# Altium PCB main.PcbDoc
Units mm, origin at the board's own origin, x right, y up, seen from the top; angles counter-clockwise.
Board outline 56.13 x 37.08 mm, 2 copper layers (Top Layer, Bottom Layer); 33 components, 25 nets, 144 pads, 358 vias.
Unrouted connection lines stored in the file: 2.
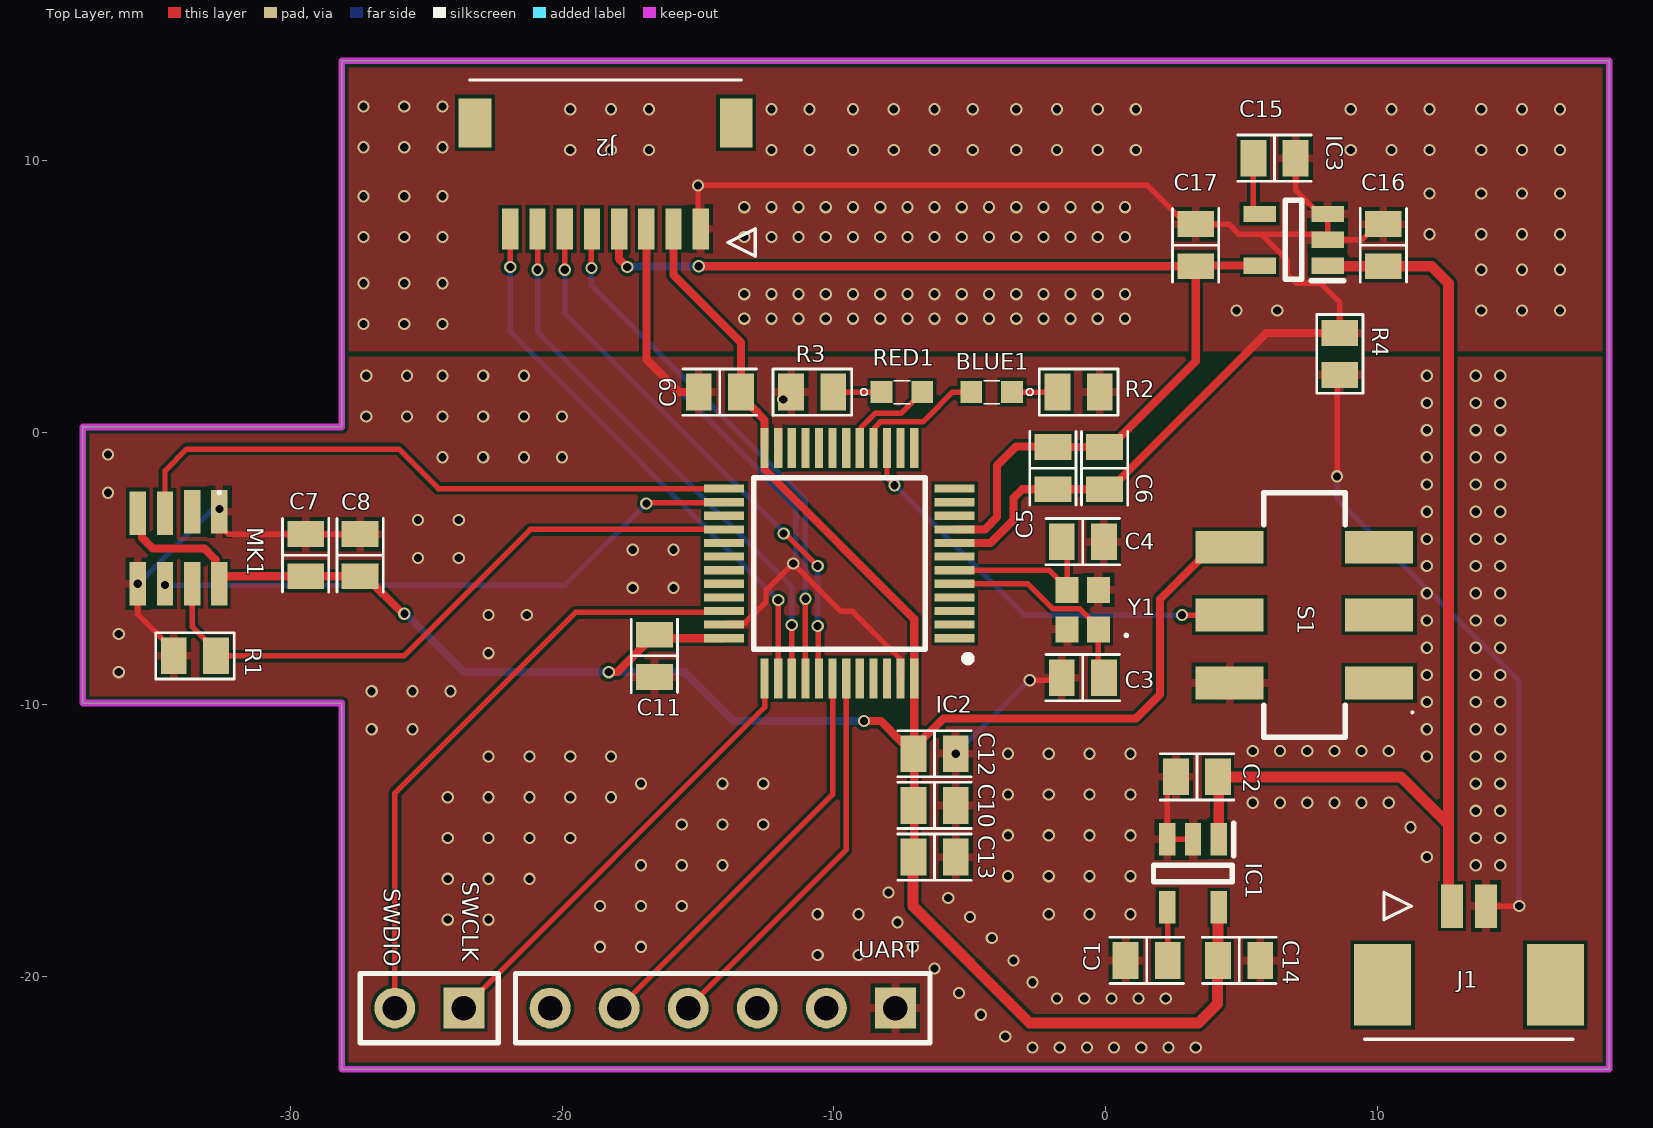
[diagram p0: Top Layer view]
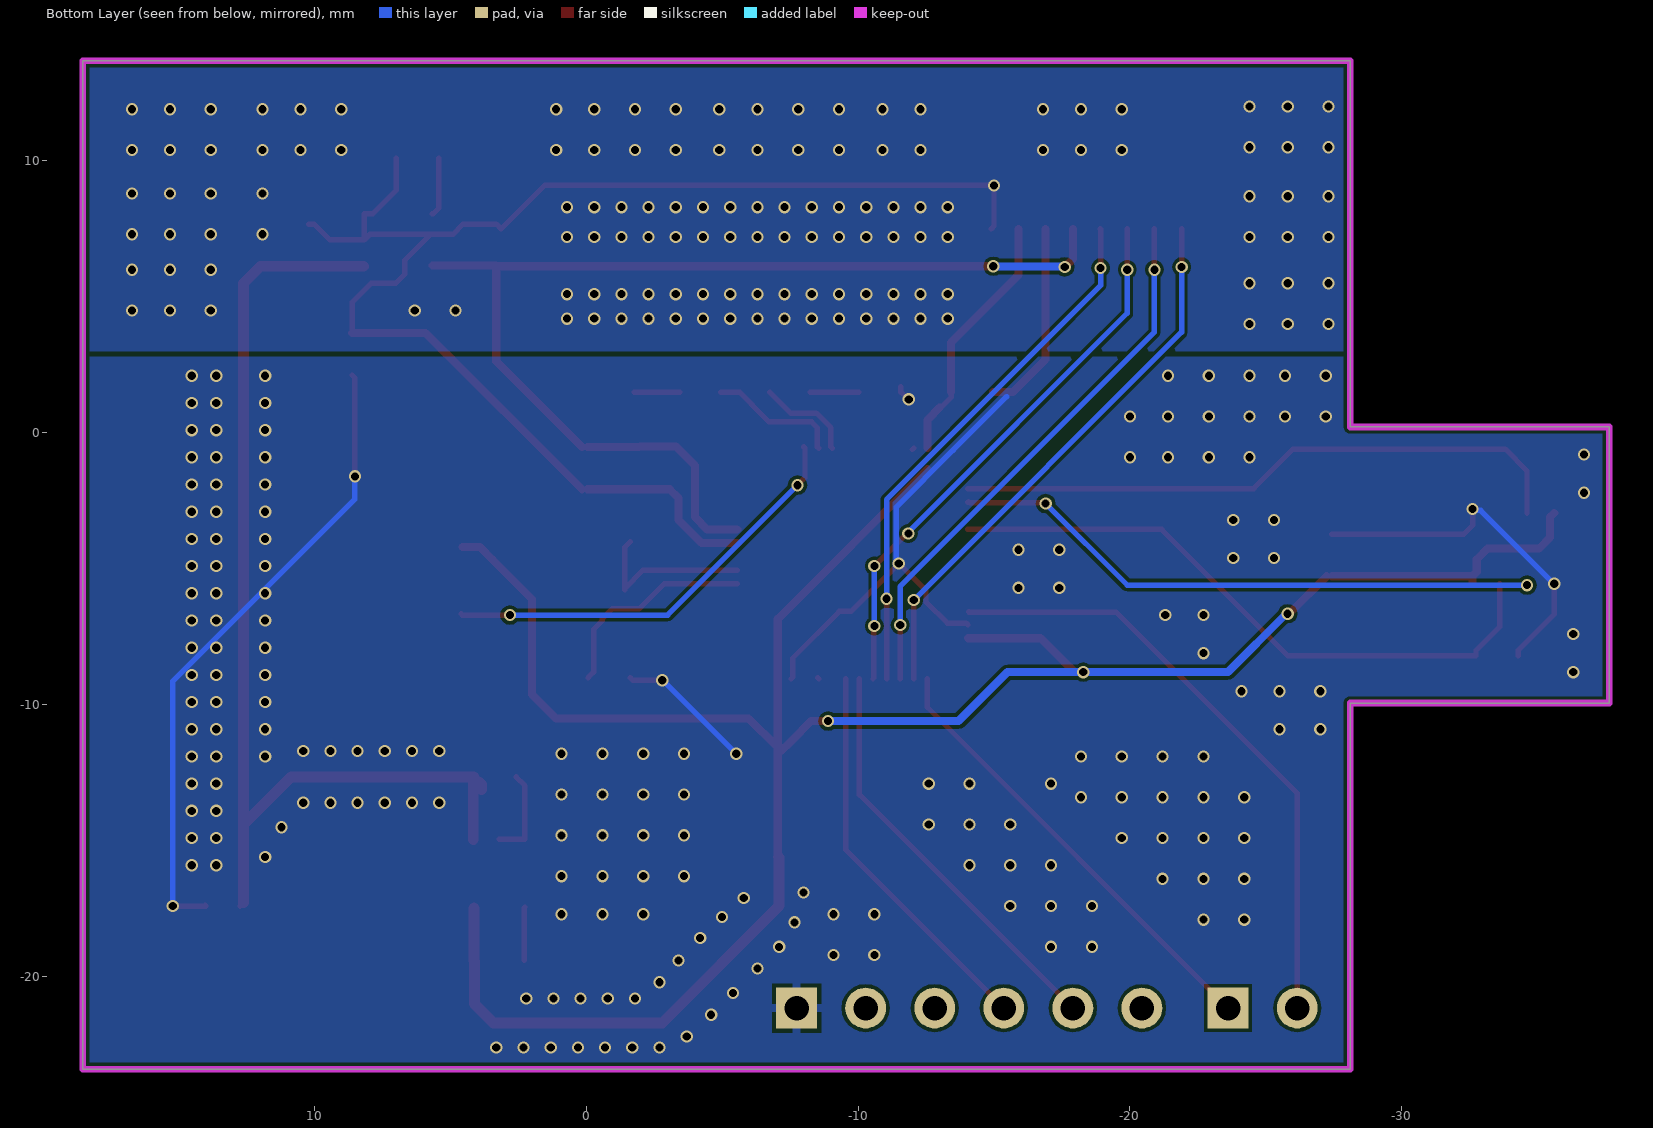
[diagram p1: Bottom Layer view, seen from below]

## Layer stack, top to bottom
Top Solder: solder mask 0.0102, Solder Resist, Dk 3.5
Top Layer: signal copper 0.0356
Dielectric 1: dielectric 0.32, FR-4, Dk 4.8
Bottom Layer: signal copper 0.0356
Bottom Solder: solder mask 0.0102, Solder Resist, Dk 3.5

## Board outline
-37.625,-9.938 -37.625,0.222 -28.1,0.222 -28.1,13.684 18.509,13.684 18.509,-23.4 -28.1,-23.4 -28.1,-9.938

## Design rules (kind name [scope] priority, off if disabled: settings)
Clearance "Poor Polygon clearance" [All] p1 off: gap=0.2 ignorepadtopadclearanceinfootprint=FALSE except(0: Text-Hole; 0.13: Text-Text) // hsdgt
Clearance "minimum clearance" [All] p2: gap=0.125 ignorepadtopadclearanceinfootprint=FALSE except(0.13: Text-Text) // hsdgt
HoleSize [All] p1: absolutevalues=TRUE maxlimit=5 minlimit=0.2 maxpercent=80.000 minpercent=20.000
PlaneClearance [All] p1: clearance=0.125
PlaneConnect [All] p1: planeconnectstyle=Relief reliefexpansion=0.2 reliefentries=4 reliefconductorwidth=0.3 reliefairgap=0.15
PolygonConnect [All] p1: thpad.connectstyle=Relief thpad.reliefconductorwidth=0.3 thpad.reliefentries=4 thpad.polygonreliefangle="90 Angle" thpad.airgapwidth=0.15 smdpad.connectstyle=Relief smdpad.reliefconductorwidth=0.3 smdpad.reliefentries=4 smdpad.polygonreliefangle="90 Angle" smdpad.airgapwidth=0.15 via.connectstyle=Direct via.reliefconductorwidth=0.3 via.reliefentries=4 via.polygonreliefangle="90 Angle" via.airgapwidth=0.15
RoutingVias "0.3 - 0.45 Via" [All] p1: holewidth=0.3 width=0.45 viastyle="Through Hole" minholewidth=0.2 minwidth=0.2 maxholewidth=5 maxwidth=5
RoutingVias "0.4 - 0.55 Via" [All] p2: holewidth=0.4 width=0.55 viastyle="Through Hole" minholewidth=0.2 minwidth=0.2 maxholewidth=5 maxwidth=5
SilkToSilkClearance [All] p1: silktosilkclearance=0.13
SolderMaskExpansion [All] p1: expansion=0.05 istentingtop=FALSE
Width "0.4 Line" [All] p1 off: maxlimit=5 minlimit=0.125 preferedwidth=0.4 minimp=50.000000 maximp=50.000000 favimp=50.000000
Width "0.2 Line" [All] p2: maxlimit=5 minlimit=0.125 preferedwidth=0.2 minimp=50.000000 maximp=50.000000 favimp=50.000000
Width "0.254 Line" [All] p3 off: maxlimit=5 minlimit=0.125 preferedwidth=0.254 minimp=50.000000 maximp=50.000000 favimp=50.000000
26 further rules are at their usual default settings.

## Components (designator, comment, footprint, x,y, rotation, side; value= is the part's Value field where it differs from the comment)
BLUE1 "LG_L29K" "OSRAM LG L29K" -4.2,1.5 r180 top
C1 "10nF" CAP_2012 1.5,-19.4 r0 top value=100pF
C2 "100nF" CAP_2012 3.35,-12.65 r0 top value=100pF
C3 "12pF" CAP_2012 -0.85,-9 r180 top value=100pF
C4 "12pF" CAP_2012 -0.85,-4 r0 top value=100pF
C5 "10nF" CAP_2012 -1.95,-1.3 r90 top value=100pF
C6 "1uF" CAP_2012 -0.05,-1.3 r90 top value=100pF
C7 "100nF" CAP_2012 -29.425,-4.5 r270 top value=100pF
C8 "10uF" CAP_2012 -27.425,-4.5 r270 top value=100pF
C9 "100nF" CAP_2012 -14.2,1.5 r0 top value=100pF
C10 "100nF" CAP_2012 -6.3,-13.7 r180 top value=100pF
C11 "100nF" CAP_2012 -16.6,-8.2 r90 top value=100pF
C12 "100nF" CAP_2012 -6.3,-11.8 r180 top value=100pF
C13 "4.7uF" CAP_2012 -6.3,-15.6 r180 top value=100pF
C14 "1uF" CAP_2012 4.9,-19.4 r180 top value=100pF
C15 "10nF" CAP_2012 6.2,10.1 r180 top value=100pF
C16 "100nF" CAP_2012 10.2,6.9 r270 top value=100pF
C17 "1uF" CAP_2012 3.3,6.9 r270 top value=100pF
IC1 "TPS79133DBVREP" SOT95P280X145-5N 3.2,-16.2 r270 top
IC2 "STM32F301C8T6TR" QFP50P900X900X160-48N -9.8,-4.8 r180 top
IC3 "TPS79133DBVREP" SOT95P280X145-5N 6.9,7.1 r180 top
J1 "532610271" 532610271 13.35,-17.4 r0 top
J2 "2035590807" 2035590807 -18.4,7.5 r180 top
MK1 "CMM-4030D-261-I2S-TR" CMM4030D261I2STR -34.1,-4.25 r90 top
R1 "100k" RES_2012 -33.5,-8.2 r0 top value=100ohm
R2 "1k" RES_2012 -1,1.5 r180 top value=100ohm
R3 "1k" RES_2012 -10.8,1.5 r0 top value=100ohm
R4 "0" RES_2012 8.6,2.9 r90 top value=100ohm
RED1 "LG_L29K" "OSRAM LG L29K" -7.5,1.5 r0 top
S1 "JS202011SCQN" JS202011SCQN 7.3,-6.7 r90 top
SWCLK "SWD" HDR1X2 -23.61,-21.15 r180 top (schematic designator 1)
UART "UART" HDR1X6 -7.74,-21.15 r180 top (schematic designator UART1)
Y1 "FA-128_32MHz" FA128480000MF20XK -0.85,-6.5 r90 top

## Footprints (in the part's own frame and the unit in brackets; to place one, negate y for a bottom-side part, rotate by r counter-clockwise, add the part's x,y. Pads: shape width x height; smd on the part's side, far side on the other; paste and mask are expansions set on the pad)
532610271 [mm]
  rect 0.8x1.6 smd: 1(-0.625,0) 2(0.625,0)
  rect 2.1x3 smd: 3(-3.175,-2.9) 4(3.175,-2.9)
  silkscreen extent -3.83,-4.9 3.83,0.5, body extent -3.83,-4.68 3.83,0.52, height 3.4
2035590807 [mm]
  rect 0.6x1.5 smd: 1(-3.5,0) 2(-2.5,0) 3(-1.5,0) 4(-0.5,0) 5(0.5,0) 6(1.5,0) 7(2.5,0) 8(3.5,0)
  rect 1.2x1.8 smd: 9(-4.8,-3.9) 10(4.8,-3.9)
  silkscreen extent -5.5,-5.48 5,1, body extent -5.05,-5.46 4.95,0.44, height 3
CAP_2012 [mm]
  rect 0.95x1.35 smd: 1(-0.775,0) 2(0.775,0)
  silkscreen extent -1.35,-0.85 1.35,0.85, body extent -1.1,-0.72 1.1,0.72, height 0.7
CMM4030D261I2STR [mm]
  rect 1.6x0.6 smd: 1(1.35,-1.5) 2(1.35,-0.5) 3(1.3,0.5) 4(1.3,1.5) 5(-1.3,1.5) 6(-1.3,0.5) 7(-1.3,-0.5) 8(-1.3,-1.5)
  silkscreen extent 2,-1.55 2.1,-1.45, body extent -1.5,-2 1.5,2, height 1.45
FA128480000MF20XK [mm]
  rect 0.95x0.85 smd: 1(-0.725,-0.575) 2(0.725,-0.575) 3(0.725,0.575) 4(-0.725,0.575)
  silkscreen extent -1,-1.65 -0.9,-1.55, body extent -1.11,-0.91 1.11,0.91, height 0.6
HDR1X2 [mm] "Connector; Header; 2 Position"
  rect 1.5x1.5 hole 0.9: 1(0,0)
  round 1.5 hole 0.9: 2(2.54,0)
  silkscreen extent -1.27,-1.27 3.81,1.27
HDR1X6 [mm] "Connector; Header; 6 Position"
  rect 1.5x1.5 hole 0.9: 1(0,0)
  round 1.5 hole 0.9: 2(2.54,0) 3(5.08,0) 4(7.62,0) 5(10.16,0) 6(12.7,0)
  silkscreen extent -1.27,-1.27 13.97,1.27
JS202011SCQN [mm]
  rect 1.2x2.5 smd: 1(-2.5,-2.75) 2(0,-2.75) 3(2.5,-2.75) 4(2.5,2.75) 5(0,2.75) 6(-2.5,2.75)
  silkscreen extent -4.5,-4 4.5,1.5, body extent -4.5,-3.5 4.5,3.5, height 5.65
"OSRAM LG L29K" [mm] "SMARTLED® 0603"
  rect 0.8x0.8 smd paste-1000 mask+0: 1(-0.75,0) 2(0.75,0)
  silkscreen extent -1.53,-0.43 0.3,0.43, body extent -1.25,-0.55 1.25,0.55, height 0.65
QFP50P900X900X160-48N [mm]
  rect 1.475x0.3 smd: 1(-4.238,2.75) 2(-4.238,2.25) 3(-4.238,1.75) 4(-4.238,1.25) 5(-4.238,0.75) 6(-4.238,0.25) 7(-4.238,-0.25) 8(-4.238,-0.75) 9(-4.238,-1.25) 10(-4.238,-1.75) 11(-4.238,-2.25) 12(-4.238,-2.75) 25(4.238,-2.75) 26(4.238,-2.25) 27(4.238,-1.75) 28(4.238,-1.25) 29(4.238,-0.75) 30(4.238,-0.25) 31(4.238,0.25) 32(4.238,0.75) 33(4.238,1.25) 34(4.238,1.75) 35(4.238,2.25) 36(4.238,2.75)
  rect 0.3x1.475 smd: 13(-2.75,-4.238) 14(-2.25,-4.238) 15(-1.75,-4.238) 16(-1.25,-4.238) 17(-0.75,-4.238) 18(-0.25,-4.238) 19(0.25,-4.238) 20(0.75,-4.238) 21(1.25,-4.238) 22(1.75,-4.238) 23(2.25,-4.238) 24(2.75,-4.238) 37(2.75,4.238) 38(2.25,4.238) 39(1.75,4.238) 40(1.25,4.238) 41(0.75,4.238) 42(0.25,4.238) 43(-0.25,4.238) 44(-0.75,4.238) 45(-1.25,4.238) 46(-1.75,4.238) 47(-2.25,4.238) 48(-2.75,4.238)
  silkscreen extent -4.85,-3.15 3.15,3.62, body extent -4.5,-4.5 4.5,4.5, height 1.6
RES_2012 [mm] "smd_chip_resistor"
  rect 0.95x1.35 smd: 1(-0.775,0) 2(0.775,0)
  silkscreen extent -1.44,-0.86 1.45,0.85, body extent -1.1,-0.72 1.1,0.72, height 0.7
SOT95P280X145-5N [mm]
  rect 1.2x0.6 smd: 1(-1.25,0.95) 2(-1.25,0) 3(-1.25,-0.95) 4(1.25,-0.95) 5(1.25,0.95)
  silkscreen extent -1.85,-1.45 0.3,1.5, body extent -1.4,-1.45 1.4,1.45, height 1.2

## Part data
BLUE1 RED1: "LED Uni-Color Green 572nm 2-Pin Chip 0603(1608Metric) T/R", Case Code (Imperial)=0603, Case Code (Metric)=1608, Color=Green, Forward Current=20mA, Forward Voltage=2.2V, Lens Color=White, Manufacturer 1="Osram Opto", Manufacturer Part Number 1=LGL29K-G2J1-24-Z, Max Operating Temperature=100°C, Min Operating Temperature=-40°C, Package Quantity=5000, Reverse Voltage=12V, Test Current=2mA, Case/Package=0603, Category=Uncategorized, ComponentLink1Description=https://datasheet.ciiva.com/4689/g-l29k-39844-4689584.pdf?src-supplier=Mouser, ComponentLink1URL=https://datasheet.ciiva.com/4689/g-l29k-39844-4689584.pdf?src-supplier=Mouser, ComponentLink2Description=https://datasheet.ciiva.com/15198/getdatasheetpartid-571127-15198411.pdf?src-supplier=Verical, ComponentLink2URL=https://datasheet.ciiva.com/15198/getdatasheetpartid-571127-15198411.pdf?src-supplier=Verical, ComponentLink3Description=https://datasheet.ciiva.com/2112/00077107-0-2112886.pdf?src-supplier=Digi-Key, ComponentLink3URL=https://datasheet.ciiva.com/2112/00077107-0-2112886.pdf?src-supplier=Digi-Key, ComponentLink4Description=https://datasheet.ciiva.com/2112/00077107-0-2112887.pdf?src-supplier=Digi-Key, ComponentLink4URL=https://datasheet.ciiva.com/2112/00077107-0-2112887.pdf?src-supplier=Digi-Key, ComponentLink5Description=https://datasheet.ciiva.com/2112/00077107-0-2112888.pdf?src-supplier=Digi-Key, ComponentLink5URL=https://datasheet.ciiva.com/2112/00077107-0-2112888.pdf?src-supplier=Digi-Key, Depth=0.8mm, Dominant Wavelength=570nm, Height=0.65mm, Illumination Color=Green, Length=1.3mm, Lens Size=0.8mm, Lens Style=Flat,Diffused,Colorless,Rectangular, Lens Transparency=Diffused, Luminous Flux=0.012lm, Luminous Intensity=5.6mcd, Mount="Surface Mount", Number of Elements=1, Number of LEDs=1, Number of Pins=2, Packaging="Tape and Reel", Pricing 1="1=0.42000, 10=0.30400, 100=0.19830, 500=0.14250, 1000=0.11153, 2500=0.10224 (USD)", Radiation Hardening=No, RoHS=Yes, Stock 1=212666, Supplier 1=Digi-Key, Viewing Angle=160°, Width=0.8mm
C1 C2 C3 C4 C5 C6 C7 C8 C9 C10 C11 C12 C13 C14 C15 C16 C17: library part "CAP 2012", "2012(Metric) smd ceramic capacitor", Case Code (Imperial)=0805, Case Code (Metric)=2012, Dielectric=Y5V, Manufacturer 1="Walsin Technologies", Manufacturer Part Number 1=0805F106Z100CT, Max Operating Temperature=85°C, Min Operating Temperature=-25°C, Tolerance=80%, Voltage Rating=10V, Case/Package=0805, ComponentLink1Description=http://components.arrow.com/part/dataview/0323_00662210?src-supplier=Arrow+Europe, ComponentLink1URL=http://components.arrow.com/part/dataview/0323_00662210?src-supplier=Arrow+Europe, ComponentLink2Description=http://www.farnell.com/datasheets/1960319.pdf?src-supplier=Farnell, ComponentLink2URL=http://www.farnell.com/datasheets/1960319.pdf?src-supplier=Farnell, ComponentLink3Description=http://www.farnell.com/datasheets/1960319.pdf?src-supplier=Element14, ComponentLink3URL=http://www.farnell.com/datasheets/1960319.pdf?src-supplier=Element14, ComponentLink4Description=http://datasheet.octopart.com/WR08W4R70FTL-Walsin-Technologies-datasheet-48038251.pdf?src-supplier=Element14, ComponentLink4URL=http://datasheet.octopart.com/WR08W4R70FTL-Walsin-Technologies-datasheet-48038251.pdf?src-supplier=Element14, ComponentLink5Description=http://datasheet.octopart.com/WR08W4R70FTL-Walsin-Technologies-datasheet-32780790.pdf, ComponentLink5URL=http://datasheet.octopart.com/WR08W4R70FTL-Walsin-Technologies-datasheet-32780790.pdf, ComponentLink6Description=https://datasheet.ciiva.com/18163/getdatasheetpartid-414444-18163626.pdf?src-supplier=Verical, ComponentLink6URL=https://datasheet.ciiva.com/18163/getdatasheetpartid-414444-18163626.pdf?src-supplier=Verical, ComponentLink7Description=http://datasheet.octopart.com/0805F106Z100CT-Walsin-Technologies-datasheet-48038160.pdf?src-supplier=Element14, ComponentLink7URL=http://datasheet.octopart.com/0805F106Z100CT-Walsin-Technologies-datasheet-48038160.pdf?src-supplier=Element14, ComponentLink8Description=http://datasheet.octopart.com/0805F106Z100CT-Walsin-Technologies-datasheet-85392065.pdf?src-supplier=Element14, ComponentLink8URL=http://datasheet.octopart.com/0805F106Z100CT-Walsin-Technologies-datasheet-85392065.pdf?src-supplier=Element14, ComponentLink9Description=http://datasheet.octopart.com/0805F106Z100CT-Walsin-Technologies-datasheet-12512437.pdf?src-supplier=Future+Electronics, ComponentLink9URL=http://datasheet.octopart.com/0805F106Z100CT-Walsin-Technologies-datasheet-12512437.pdf?src-supplier=Future+Electronics, ComponentLink10Description=http://datasheet.octopart.com/0805F106Z100CT-Walsin-Technologies-datasheet-26371553.pdf?src-supplier=Future+Electronics, ComponentLink10URL=http://datasheet.octopart.com/0805F106Z100CT-Walsin-Technologies-datasheet-26371553.pdf?src-supplier=Future+Electronics, ComponentLink11Description=http://datasheet.octopart.com/0805F106Z100CT-Walsin-Technologies-datasheet-128065749.pdf?src-supplier=Future+Electronics, ComponentLink11URL=http://datasheet.octopart.com/0805F106Z100CT-Walsin-Technologies-datasheet-128065749.pdf?src-supplier=Future+Electronics, Depth=1.25mm, Lead Free="Lead Free", Length=2mm, Packaging="Tape and Reel", Pricing 1="3000=0.03360, 6000=0.03000, 12000=0.02980, 15000=0.02970, 45000=0.02920 (USD)", Radiation Hardening=No, REACH SVHC=Unknown, Stock 1=99000, Supplier 1="Future Electronics", Voltage Rating (DC)=10V
IC1 IC3: "Integrated Circuit", Manufacturer_Name="Texas Instruments", Mouser Part Number=595-TPS79133DBVREP, Arrow Part Number=TPS79133DBVREP, Arrow Price/Stock=https://www.arrow.com/en/products/tps79133dbvrep/texas-instruments?region=nac, Datasheet Link=http://www.ti.com/lit/gpn/tps79133-ep, Height=1.45mm, Manufacturer_Part_Number=TPS79133DBVREP, Mouser Price/Stock=https://www.mouser.co.uk/ProductDetail/Texas-Instruments/TPS79133DBVREP?qs=BBezV1N05%2Ft%252BRv0piYUUyA%3D%3D
IC2: "Integrated Circuit", Manufacturer_Name=STMicroelectronics, Mouser Part Number=511-STM32F301C8T6TR, Arrow Part Number=STM32F301C8T6TR, Arrow Price/Stock=https://www.arrow.com/en/products/stm32f301c8t6tr/stmicroelectronics?region=nac, Datasheet Link=https://componentsearchengine.com/Datasheets/2/STM32F301C8T6TR.pdf, Height=1.6mm, Manufacturer_Part_Number=STM32F301C8T6TR, Mouser Price/Stock=https://www.mouser.co.uk/ProductDetail/STMicroelectronics/STM32F301C8T6TR?qs=qIaFMfck%2FPYy56%2F%252BEeuvMw%3D%3D
J1 J2: "Connector", Manufacturer_Name=Molex
  J1: Arrow Part Number=532610271, Arrow Price/Stock=https://www.arrow.com/en/products/53261-0271/molex?region=nac, Datasheet Link=https://www.molex.com/pdm_docs/sd/532610271_sd.pdf, Height=3.4mm, Manufacturer_Part_Number=532610271
  J2: Datasheet Link=https://www.molex.com/pdm_docs/sd/2035590207_sd.pdf, Height=3.2mm, Manufacturer_Part_Number=2035590807
MK1: "Microphone", Manufacturer_Name="CUI Inc.", Mouser Part Number=490-CMM4030D261I2STR, Datasheet Link=https://www.mouser.co.uk/datasheet/2/670/cmm_4030d_261_i2s_tr-1892247.pdf, Height=1.35mm, Manufacturer_Part_Number=CMM-4030D-261-I2S-TR, Mouser Price/Stock=https://www.mouser.co.uk/ProductDetail/CUI-Devices/CMM-4030D-261-I2S-TR?qs=hWgE7mdIu5S0cyoxFo6Z3Q%3D%3D
R1 R2 R3 R4: library part "RES 2012", "2012(Metric) smd resistor", Case Code (Imperial)=0805, Case Code (Metric)=2012, Manufacturer 1="Walsin Technologies", Manufacturer Part Number 1=WR08W4R70FTL, Manufacturer_Part_Number="WR08X000 PTL", Power Rating=125mW, Temperature Coefficient=400ppm/°C, Tolerance=1%, Voltage Rating=150V, Built_By=EMA_Justin, Case/Package=0805, ComponentLink1Description=http://components.arrow.com/part/dataview/0323_00662210?src-supplier=Arrow+Europe, ComponentLink1URL=http://components.arrow.com/part/dataview/0323_00662210?src-supplier=Arrow+Europe, ComponentLink2Description=http://www.farnell.com/datasheets/1960319.pdf?src-supplier=Farnell, ComponentLink2URL=http://www.farnell.com/datasheets/1960319.pdf?src-supplier=Farnell, ComponentLink3Description=http://www.farnell.com/datasheets/1960319.pdf?src-supplier=Element14, ComponentLink3URL=http://www.farnell.com/datasheets/1960319.pdf?src-supplier=Element14, ComponentLink4Description=http://datasheet.octopart.com/WR08W4R70FTL-Walsin-Technologies-datasheet-48038251.pdf?src-supplier=Element14, ComponentLink4URL=http://datasheet.octopart.com/WR08W4R70FTL-Walsin-Technologies-datasheet-48038251.pdf?src-supplier=Element14, ComponentLink5Description=http://datasheet.octopart.com/WR08W4R70FTL-Walsin-Technologies-datasheet-32780790.pdf, ComponentLink5URL=http://datasheet.octopart.com/WR08W4R70FTL-Walsin-Technologies-datasheet-32780790.pdf, Composition="Thick Film", Contact Material=Tin, Copyright="Copyright (C) 2016 Accelerated Designs. All rights reserved", Lead Free="Lead Free", Mount="Surface Mount", Packaging="Cut Tape", Pricing 1="5000=0.00180 (USD)", REACH SVHC=Unknown, RefDes=RefDes, Stock 1=60000, Supplier 1=Arrow, Type=DEV, Vendor=Walsin, Voltage Rating (DC)=150V
S1: "Switch", Manufacturer_Name="C & K COMPONENTS", Mouser Part Number=611-JS202011SCQN, Arrow Part Number=JS202011SCQN, Arrow Price/Stock=https://www.arrow.com/en/products/js202011scqn/ck?region=nac, Datasheet Link=https://www.ckswitches.com/media/1422/js.pdf, Height=5.5mm, Manufacturer_Part_Number=JS202011SCQN, Mouser Price/Stock=https://www.mouser.co.uk/ProductDetail/CK/JS202011SCQN?qs=LgMIjt8LuD95JYWxZ7NvZA%3D%3D
SWCLK: library part "Header 2", "Header, 2-Pin", LatestRevisionDate=17-Jul-2002, LatestRevisionNote="Re-released for DXP Platform.", Publisher="Altium Limited"
UART: library part "Header 6", "Header, 6-Pin", LatestRevisionDate=17-Jul-2002, LatestRevisionNote="Re-released for DXP Platform.", Publisher="Altium Limited"
Y1: library part FA-128_48.0000MF20X-K, "Crystal or Oscillator", Manufacturer_Name="Epson Timing", Manufacturer_Part_Number="FA-128 48.0000MF20X-K", Mouser Part Number=732-FA-12848F20X-K, Datasheet Link="https://componentsearchengine.com/Datasheets/1/FA-128 48.0000MF20X-K.pdf", Height=0.5mm, Mouser Price/Stock=https://www.mouser.com/Search/Refine.aspx?Keyword=732-FA-12848F20X-K

## Via types
v1: diameter 0.45, hole 0.3, Top Layer to Bottom Layer, 358 vias

## Nets (pads, with @x,y where several pads share a name; then routed paths per layer and width w, separated by ;. In a path a pad name is that pad's centre, name@x,y a point inside that pad or via, vN(x,y) a via of type N, cw(c..) or ccw(c..) an arc to the next point about the centre after c; other vN are vias at no path point)
AGND: C5.1 C6.1 C15.1 C16.1 C17.1 IC2.8 IC3.2 IC3.3 J2.1 R4.2 | length 54.9
  Top Layer w0.2: J2.1 -15,7.6 v1(-15,9.1) 1.525,9.1 3.125,7.5 C17.1 4.525,7.675 4.9,7.3 5.718,7.3 ; C6.1 C6.1@0.15,-2.075 ; C15.1 6.975,8.925 7.85,8.05 IC3.3 IC3.2 ; R4.2 8.6,4.8 7.9,5.5 7,5.5 6.672,5.828 6.672,6.347 5.718,7.3 ; C16.1 10,7.675 9.425,7.1 IC3.2 ; 5.718,7.3 7.95,7.3 IC3.2
  Top Layer w0.3: IC2.8 -4.25,-4.05 -3.4,-3.2 -3.4,-2.4 -3.075,-2.075 C5.1 C6.1 ; C6.1@0.15,-2.075 5.9,3.675 R4.2
  other v1: -27.3,4 -25.8,4 -24.4,4 -13.3,4.2 -12.3,4.2 -11.3,4.2 -10.3,4.2 -9.3,4.2 -8.3,4.2 -7.3,4.2 -6.3,4.2 -5.3,4.2 -4.3,4.2 -3.3,4.2 -2.3,4.2 -1.3,4.2 -0.3,4.2 0.7,4.2 4.8,4.5 6.3,4.5 13.8,4.5 15.3,4.5 16.7,4.5 -13.3,5.1 -12.3,5.1 -11.3,5.1 -10.3,5.1 -9.3,5.1 -8.3,5.1 -7.3,5.1 -6.3,5.1 -5.3,5.1 -4.3,5.1 -3.3,5.1 -2.3,5.1 -1.3,5.1 -0.3,5.1 0.7,5.1 -27.3,5.5 -25.8,5.5 -24.4,5.5 13.8,6 15.3,6 16.7,6 -27.3,7.2 -25.8,7.2 -24.4,7.2 -13.3,7.2 -12.3,7.2 -11.3,7.2 -10.3,7.2 -9.3,7.2 -8.3,7.2 -7.3,7.2 -6.3,7.2 -5.3,7.2 -4.3,7.2 -3.3,7.2 -2.3,7.2 -1.3,7.2 -0.3,7.2 0.7,7.2 11.9,7.3 13.8,7.3 15.3,7.3 16.7,7.3 -13.3,8.3 -12.3,8.3 -11.3,8.3 -10.3,8.3 -9.3,8.3 -8.3,8.3 -7.3,8.3 -6.3,8.3 -5.3,8.3 -4.3,8.3 -3.3,8.3 -2.3,8.3 -1.3,8.3 -0.3,8.3 0.7,8.3 -27.3,8.7 -25.8,8.7 -24.4,8.7 11.9,8.8 13.8,8.8 15.3,8.8 16.7,8.8 -19.7,10.4 -18.2,10.4 -16.8,10.4 -12.3,10.4 -10.9,10.4 -9.3,10.4 -7.8,10.4 -6.3,10.4 -4.9,10.4 -3.3,10.4 -1.8,10.4 -0.3,10.4 1.1,10.4 9,10.4 10.5,10.4 11.9,10.4 13.8,10.4 15.3,10.4 16.7,10.4 -27.3,10.5 -25.8,10.5 -24.4,10.5 -19.7,11.9 -18.2,11.9 -16.8,11.9 -12.3,11.9 -10.9,11.9 -9.3,11.9 -7.8,11.9 -6.3,11.9 -4.9,11.9 -3.3,11.9 -1.8,11.9 -0.3,11.9 1.1,11.9 9,11.9 10.5,11.9 11.9,11.9 13.8,11.9 15.3,11.9 16.7,11.9 -27.3,12 -25.8,12 -24.4,12
BAT_VCC: C2.2 C16.2 IC1.1 IC3.1 J1.1 | length 39.5
  Top Layer w0.2: C2.2 C2.2@4.15,-12.675 ; IC3.1 IC3.1@8.175,6.125 ; J1.1@12.6,-17.275 J1.1
  Top Layer w0.4: C2.2@3.85,-13.125 3.85,-12.925 C2.2@3.938,-12.838 ; C2.2 10.85,-12.65 12.6,-14.4 ; IC1.1 C2.2@4.15,-12.675 ; IC3.1@8.175,6.125 C16.2 11.975,6.125 12.6,5.5 12.6,-14.4 ; J1.1@12.6,-17.275 12.6,-14.4
GND: C1.1 C2.1 C3.2 C4.2 C7.1 C8.1 C9.1 C10.1 C11.1 C12.1 C13.1 C14.1 IC1.2 IC1.3 IC2.23 IC2.35 IC2.47 J1.2 J2.3 MK1.1 MK1.5 R1.1 R2.1 R3.1 R4.1 S1.6 UART.1 Y1.2 Y1.4 | length 70.8
  Top Layer w0.2: v1(-35.6,-5.55) -35.6,-6.675 -34.275,-8 R1.1 ; MK1.1 -32.6,-3.4 -32.275,-3.725 C7.1 C8.1 ; IC2.35 -13.988,-7 -13.282,-7 -12.5,-6.218 -12.5,-5.8 v1(-11.5,-4.8) -9.735,-6.565 -9.317,-6.565 -7.6,-8.282 -7.6,-8.988 IC2.47 ; IC2.23 IC2.23@-12,-0.612 ; v1(-11.868,1.232) -11.843,1.232 R3.1 R3.1@-11.575,1.7 ; v1(-2.8,-9.1) -1.725,-9.1 C3.2 ; C2.1 2.25,-12.975 IC1.3 IC1.2 ; v1(8.5,-1.6) 8.5,2.025 R4.1 ; J1.2 14,-17.375 14.025,-17.4 v1(15.2,-17.4)
  Top Layer w0.3: J2.3 -16.9,2.7 -15.7,1.5 C9.1
  Bottom Layer w0.2: v1(-35.6,-5.55) -32.898,-2.848 -32.648,-2.848 v1(-32.6,-2.8) ; -15.468,1.332 -13.499,-0.638 -11.4,-2.736 -11.4,-4.632 -11.5,-4.732 v1(-11.5,-4.8) ; v1(-5.525,-11.8) -2.825,-9.1 v1(-2.8,-9.1) ; v1(8.5,-1.6) 8.5,-2.436 15.2,-9.136 v1(15.2,-17.4)
  other v1: -2.7,-22.6 -1.7,-22.6 -1.7,-22.6 -0.7,-22.6 0.3,-22.6 1.3,-22.6 2.3,-22.6 2.3,-22.6 3.3,-22.6 -3.7,-22.2 -4.6,-21.4 -1.8,-20.8 -0.8,-20.8 0.2,-20.8 1.2,-20.8 1.2,-20.8 2.2,-20.8 -5.4,-20.6 -2.7,-20.2 -6.3,-19.7 -3.4,-19.4 -10.6,-19.2 -9.1,-19.2 -18.6,-18.9 -17.1,-18.9 -7.1,-18.9 -4.194,-18.575 -7.663,-18 -24.2,-17.9 -22.7,-17.9 -5,-17.8 -10.6,-17.7 -9.1,-17.7 -2.1,-17.7 -0.6,-17.7 0.9,-17.7 -18.6,-17.4 -17.1,-17.4 -15.6,-17.4 -5.8,-17.1 -8,-16.9 -24.2,-16.4 -22.7,-16.4 -21.2,-16.4 -3.6,-16.3 -2.1,-16.3 -0.6,-16.3 0.9,-16.3 -17.1,-15.9 -15.6,-15.9 -14.1,-15.9 13.6,-15.9 14.5,-15.9 11.8,-15.6 -24.2,-14.9 -22.7,-14.9 -21.2,-14.9 -19.7,-14.9 13.6,-14.9 13.6,-14.9 14.5,-14.9 14.5,-14.9 -3.6,-14.8 -2.1,-14.8 -0.6,-14.8 0.9,-14.8 11.2,-14.5 -15.6,-14.4 -14.1,-14.4 -12.6,-14.4 13.6,-13.9 14.5,-13.9 5.4,-13.6 6.4,-13.6 7.4,-13.6 8.4,-13.6 8.4,-13.6 9.4,-13.6 10.4,-13.6 -24.2,-13.4 -22.7,-13.4 -21.2,-13.4 -19.7,-13.4 -18.2,-13.4 -3.6,-13.3 -2.1,-13.3 -0.6,-13.3 0.9,-13.3 -17.1,-12.9 -14.1,-12.9 -12.6,-12.9 13.6,-12.9 14.5,-12.9 -22.7,-11.9 -21.2,-11.9 -19.7,-11.9 -18.2,-11.9 11.8,-11.9 13.6,-11.9 14.5,-11.9 -3.6,-11.8 -2.1,-11.8 -0.6,-11.8 0.9,-11.8 5.4,-11.7 6.4,-11.7 7.4,-11.7 8.4,-11.7 8.4,-11.7 9.4,-11.7 10.4,-11.7 -27,-10.9 -25.5,-10.9 11.8,-10.9 13.6,-10.9 14.5,-10.9 11.8,-9.9 13.6,-9.9 14.5,-9.9 -27,-9.5 -25.5,-9.5 -24.1,-9.5 -24.1,-9.5 11.8,-8.9 11.8,-8.9 13.6,-8.9 13.6,-8.9 14.5,-8.9 14.5,-8.9 -36.3,-8.8 -22.7,-8.1 -22.7,-8.1 -22.7,-8.1 11.8,-7.9 13.6,-7.9 14.5,-7.9 -36.3,-7.4 11.8,-6.9 13.6,-6.9 14.5,-6.9 -22.7,-6.7 -21.3,-6.7 -21.3,-6.7 -21.3,-6.7 -21.3,-6.7 -21.3,-6.7 11.8,-5.9 13.6,-5.9 14.5,-5.9 -17.4,-5.7 -15.9,-5.7 11.8,-4.9 13.6,-4.9 14.5,-4.9 -25.3,-4.6 -23.8,-4.6 -17.4,-4.3 -15.9,-4.3 11.8,-3.9 13.6,-3.9 14.5,-3.9 -25.3,-3.2 -23.8,-3.2 11.8,-2.9 13.6,-2.9 14.5,-2.9 -36.7,-2.2 11.8,-1.9 13.6,-1.9 14.5,-1.9 -24.4,-0.9 -22.9,-0.9 -21.4,-0.9 -20,-0.9 11.8,-0.9 13.6,-0.9 14.5,-0.9 -36.7,-0.8 11.8,0.1 13.6,0.1 14.5,0.1 -27.2,0.6 -25.7,0.6 -24.4,0.6 -22.9,0.6 -21.4,0.6 -20,0.6 11.8,1.1 13.6,1.1 14.5,1.1 -27.2,2.1 -25.7,2.1 -24.4,2.1 -22.9,2.1 -21.4,2.1 11.8,2.1 13.6,2.1 14.5,2.1
Net1_1: IC2.37 SWCLK.1 | length 16.7
  Top Layer w0.2: SWCLK.1 -12.55,-10.09 IC2.37
Net1_2: IC2.34 SWCLK.2 | length 22.7
  Top Layer w0.2: SWCLK.2 -26.15,-13.25 -19.5,-6.6 -14.088,-6.6 IC2.34@-14.066,-6.578
NetBLUE1_1: BLUE1.1 R2.2 | length 1.7
  Top Layer w0.2: BLUE1.1 R2.2
NetBLUE1_2: BLUE1.2 IC2.16 | length 4.9
  Top Layer w0.2: IC2.16 -8.5,-0.512 -8.5,0.194 -8.293,0.401 -6.731,0.401 -6.091,1.041 -6.091,1.059 -5.65,1.5 BLUE1.2
NetC1_2: C1.2 IC1.4 | length 2
  Top Layer w0.2: IC1.4 2.275,-17.475 C1.2
NetC3_1: C3.1 IC2.5 Y1.1 | length 7.9
  Top Layer w0.2: IC2.5 -2.868,-5.55 -1.943,-6.475 -0.957,-6.475 -0.6,-6.832 -0.6,-6.9 Y1.1 -0.275,-8.8 C3.1
NetC4_1: C4.1 IC2.6 Y1.3 | length 6.3
  Top Layer w0.2: IC2.6 -2.1,-5.05 Y1.3@-1.425,-5.725 ; C4.1 -1.425,-4.2 Y1.3@-1.425,-5.725 ; Y1.3 Y1.3@-1.425,-5.725
NetC15_2: C15.2 IC3.4 | length 2.2
  Top Layer w0.2: C15.2 5.425,8.25 5.625,8.05 IC3.4
NetIC2_15: IC2.15 S1.5 | length 15.9
  Top Layer w0.2: IC2.15@-8,-0.512 IC2.15 -8.05,-1.65 v1(-7.775,-1.925) ; v1(2.8,-6.7) S1.5 S1.5@4.6,-6.65
  Bottom Layer w0.2: v1(-7.775,-1.925) -3,-6.7 v1(2.8,-6.7)
NetIC2_17: IC2.17 RED1.2 | length 3.6
  Top Layer w0.2: IC2.17 -9,-0.512 -9,0.194 -8.468,0.726 -7.524,0.726 RED1.2
NetIC2_25: IC2.25 MK1.3 | length 23
  Top Layer w0.2: MK1.3 -34.6,-1.4 -33.8,-0.6 -26,-0.6 -24.55,-2.05 IC2.25
NetIC2_26: IC2.26 MK1.6 | length 21.9
  Top Layer w0.2: v1(-34.6,-5.6) MK1.6 ; v1(-16.9,-2.6) -16.875,-2.575 -14.113,-2.575 -14.063,-2.525 IC2.26
  Bottom Layer w0.2: v1(-34.6,-5.6) -19.9,-5.6 v1(-16.9,-2.6)
NetIC2_28: IC2.28 MK1.7 R1.2 | length 23.6
  Top Layer w0.2: MK1.7 -33.6,-7.125 -32.725,-8 R1.2 -25.813,-8.2 -21.163,-3.55 IC2.28
NetIC2_38: IC2.38 J2.8 | length 20.6
  Top Layer w0.2: v1(-21.9,6.1) J2.8 ; IC2.38 v1(-12.05,-6.15)
  Bottom Layer w0.2: v1(-21.9,6.1) -21.9,3.7 v1(-12.05,-6.15)
NetIC2_39: IC2.39 J2.7 | length 20.4
  Top Layer w0.2: v1(-20.9,6) J2.7 ; IC2.39 v1@-11.55,-7.062
  Bottom Layer w0.2: v1(-20.9,6) -20.9,3.7 -11.55,-5.65 -11.55,-7.061 v1(-11.551,-7.062)
NetIC2_40: IC2.40 J2.5 | length 19.8
  Top Layer w0.2: v1(-18.919,6.066) -18.919,7.481 J2.5 ; IC2.40 v1(-11.05,-6.1)
  Bottom Layer w0.2: v1(-18.919,6.066) -18.919,5.419 -11.05,-2.45 v1(-11.05,-6.1)
NetIC2_41: IC2.41 J2.6 | length 20.4
  Top Layer w0.2: v1(-19.9,6) J2.6 ; v1(-11.85,-3.7) -11.8,-3.7 v1(-10.6,-4.9) ; v1(-10.6,-7.1) -10.575,-7.125 -10.575,-9.013 IC2.41
  Bottom Layer w0.2: v1(-19.9,6) -19.9,4.4 -11.85,-3.65 v1(-11.85,-3.7) ; v1(-10.6,-7.1) v1(-10.6,-4.9)
NetIC2_42: IC2.42 UART.5 | length 15.4
  Top Layer w0.2: UART.5 -10.05,-13.3 IC2.42
NetIC2_43: IC2.43 UART.4 | length 14.5
  Top Layer w0.2: UART.4 -9.55,-15.34 IC2.43
NetR3_2: R3.2 RED1.1 | length 1.8
  Top Layer w0.2: R3.2 RED1.1
VCC: C7.2 C8.2 C9.2 C10.2 C11.2 C12.2 C13.2 C14.2 IC1.5 IC2.24 IC2.36 IC2.48 J2.2 MK1.4 MK1.8 S1.4 | length 99.4
  Top Layer w0.2: MK1.8@-32.6,-5.262 MK1.8@-32.587,-5.275 ; C8.2 C8.2@-27.225,-5.275 ; v1@-25.848,-6.652 v1(-25.798,-6.652) ; C9.2 -13.425,1.3 -13.05,0.925 C9.2@-12.999,0.925 ; C13.2 C13.2@-7.05,-15.575 ; C12.2 C12.2@-7.075,-11.6 ; IC1.5@4.125,-17.475 IC1.5
  Top Layer w0.3: MK1.4 -35.45,-3.1 -35.45,-3.85 -35.05,-4.25 -33.15,-4.25 -32.75,-4.65 -32.75,-5.112 -32.6,-5.262 MK1.8 ; MK1.8@-32.587,-5.275 C7.2 C8.2 ; C8.2@-27.225,-5.275 v1@-25.848,-6.652 ; v1(-18.282,-8.8) -17.964,-8.8 -16.714,-7.55 IC2.36 ; J2.2 -15.9,5.8 -13.425,3.325 C9.2 ; C9.2@-12.999,0.925 -12.55,0.476 IC2.24 ; -12.55,-1.338 -7.05,-6.838 IC2.48 C12.2@-7.05,-11.575 ; v1(-8.9,-10.6) -8.275,-10.6 -7.55,-11.325 C12.2@-7.175,-11.7 ; C13.2@-7.05,-15.575 -7.05,-13.7 -7.05,-11.8 -7.05,-11.7 C12.2@-7.05,-11.575 ; S1.4 3.9,-4.2 3.45,-4.65 1.982,-6.118 1.982,-9.618 1.1,-10.5 -5.975,-10.5 C12.2@-7.05,-11.575
  Top Layer w0.4: C13.2 -7.1,-15.625 -7.1,-17.4 -2.8,-21.7 3.4,-21.7 4.1,-21 4.1,-19.425 C14.2 IC1.5@4.125,-17.475
  Bottom Layer w0.2: v1(-25.798,-6.652) v1@-25.748,-6.652
  Bottom Layer w0.3: v1@-25.748,-6.652 -23.6,-8.8 v1(-18.282,-8.8) -15.5,-8.8 -13.7,-10.6 v1(-8.9,-10.6)
VDDIO: C5.2 C6.2 C17.2 IC2.9 IC3.5 J2.4 | length 40.9
  Top Layer w0.2: IC2.9 IC2.9@-5.512,-3.5 ; C6.2 C6.2@0.15,-0.525 ; C17.2 C17.2@3.325,6.15
  Top Layer w0.3: J2.4 -17.9,6.4 v1(-17.6,6.1) ; v1(-14.975,6.125) C17.2 3.3,2.625 C6.2@0.15,-0.525 ; IC2.9 -4.45,-3.55 -4,-3.1 -4,-1.2 -3.3,-0.5 -1.975,-0.5 C5.2 C6.2 ; C17.2@3.325,6.15 IC3.5
  Bottom Layer w0.3: v1(-17.6,6.1) -17.588,6.112 -14.988,6.112 v1(-14.975,6.125)
pads on no net: IC2.1 IC2.2 IC2.3 IC2.4 IC2.7 IC2.10 IC2.11 IC2.12 IC2.13 IC2.14 IC2.18 IC2.19 IC2.20 IC2.21 IC2.22 IC2.27 IC2.29 IC2.30 IC2.31 IC2.32 IC2.33 IC2.44 IC2.45 IC2.46 J1.3 J1.4 J2.9 J2.10 MK1.2 S1.1 S1.2 S1.3 UART.2 UART.3 UART.6
copper on no net: | length 0
  Top Layer w0.2: -8.55,-9.038 -8.525,-9.013

## Polygon pours and split planes (outlines as drawn)
AGND on Top Layer "AGND_L01_P003" (solid, remove dead copper, pour order 3): -28.1,13.684 18.509,13.684 18.509,3 -28.1,3
GND on Top Layer "GND_L01_P001" (solid, remove dead copper, pour order 1): 18.5,2.8 18.5,-23.391 18.509,-23.4 -28.1,-23.4 -28.1,-9.938 -37.625,-9.938 -37.625,0.222 -28.1,0.222 -28.1,2.8
AGND on Bottom Layer "AGND_L02_P000" (solid, remove dead copper, pour order 0): -28.1,13.684 18.509,13.684 18.509,3 -28.1,3
GND on Bottom Layer "GND_L02_P002" (solid, remove dead copper, pour order 2): 18.5,2.8 18.5,-23.391 18.509,-23.4 -28.1,-23.4 -28.1,-9.938 -37.625,-9.938 -37.625,0.222 -28.1,0.222 -28.1,2.8

## Keep-outs
Keep-Out Layer:
  lines w0.254: -37.625,-9.938 -37.625,0.222 -32.291,0.222 -28.1,0.222 -28.1,13.684 18.509,13.684 18.509,-23.4 -28.1,-23.4 -28.1,-9.938 -34.704,-9.938 -37.625,-9.938

## Silkscreen, mask and mechanical layers (free items; w line width, h text height)
Top Overlay:
  text "SWDIO" at -26.55,-16.75 h0.6 r270